# EAGLE board mirobot (EAGLE 6.5.0)
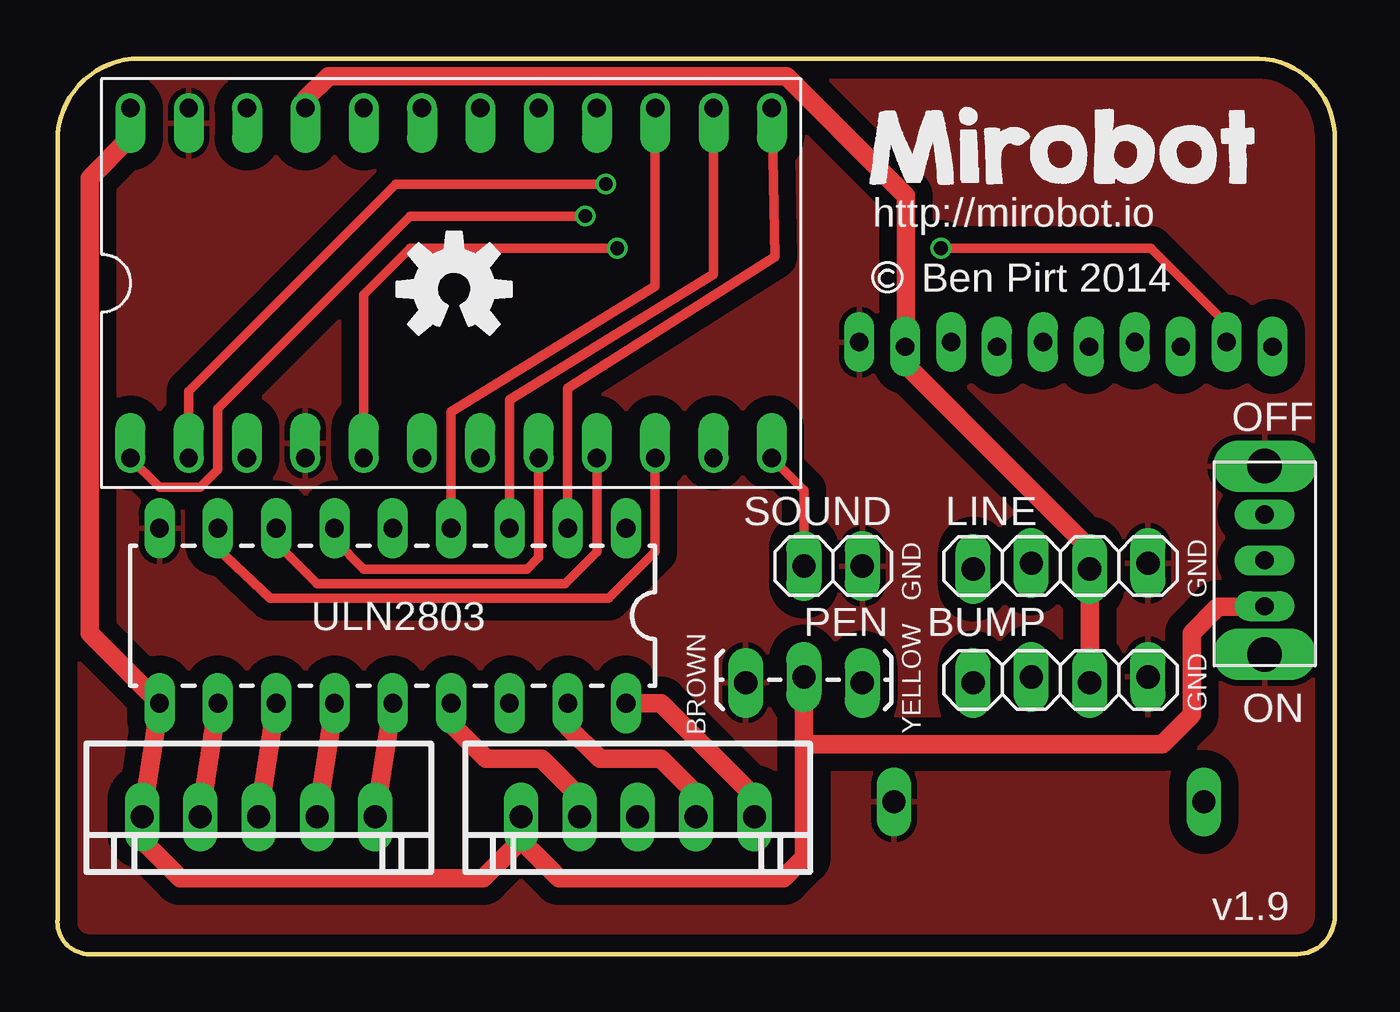
[diagram p0: board, top side]
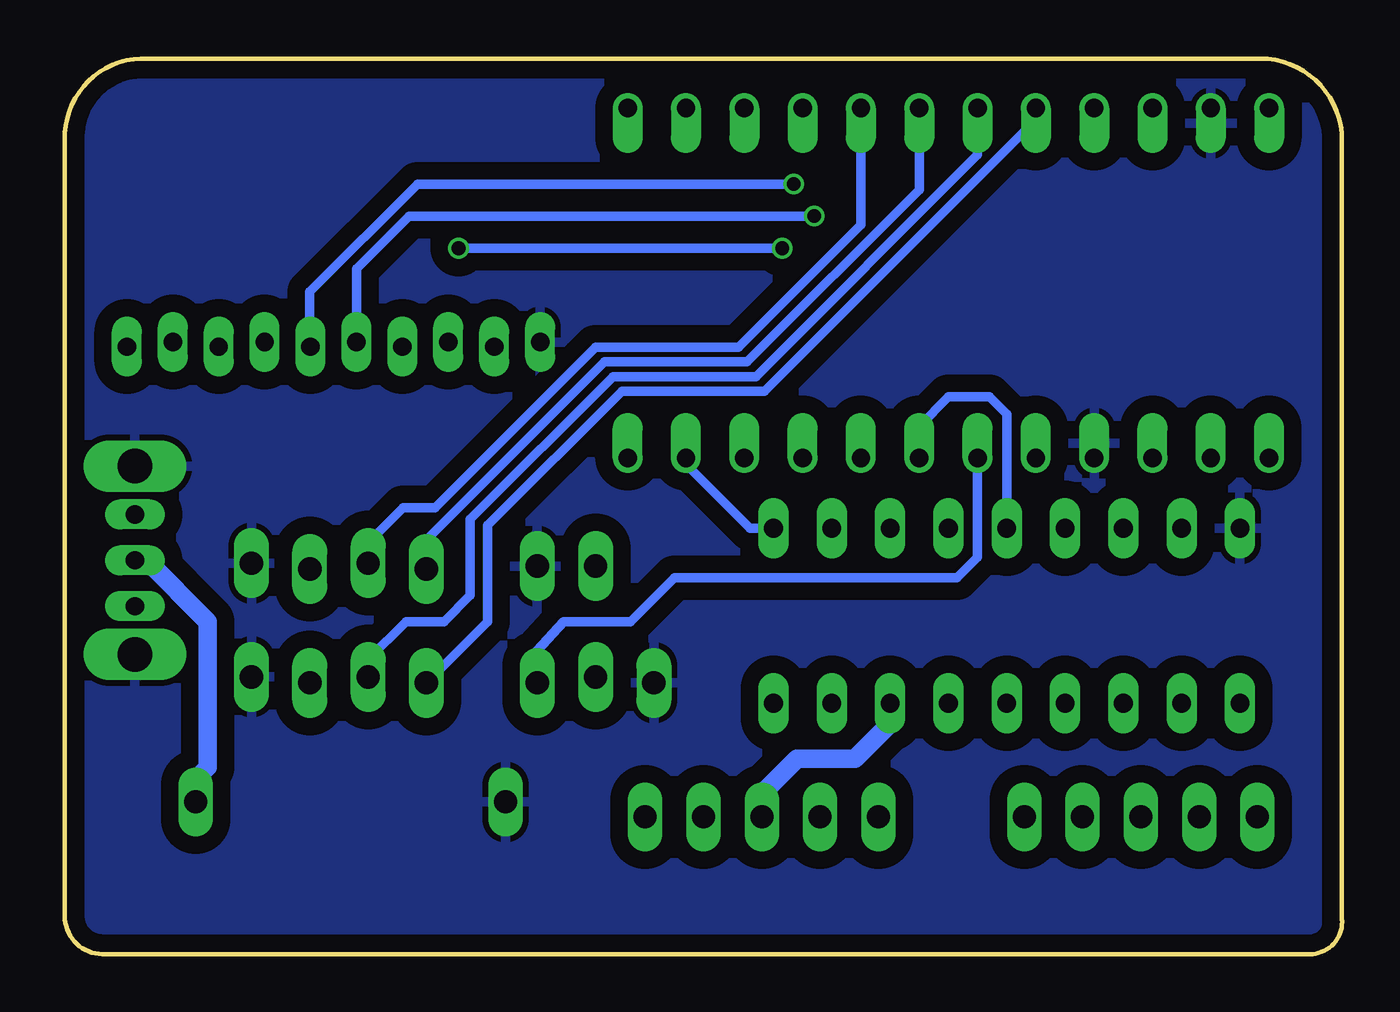
[diagram p1: board, bottom side, seen from below]

Size 55.63 x 38.99 mm. Coordinates in mm from the lower left corner, seen from the top.
Outline: 0.01,35.44 0.01,1.53 arc90 1.28,0 53.85,0 arc90 55.63,1.53 55.63,35.44 arc90 52.33,38.99 3.56,38.99 arc90 0.01,35.44
Copper layers (1*16): Top 0.035mm / dielectric 1.5mm / Bottom 0.035mm
Design rules "dirt_cheap_dirty_boards.v1": minimum track width 5mil, minimum drill 12mil, track to track 5mil, track to pad 5mil, pad to pad 5mil, via to via 5mil, smd to smd 0mil, copper to edge 10mil, drill to drill 10mil, minimum pad ring 10mil, minimum via ring 6mil, stop-mask expansion 2mil, vias tented up to drill 25mil, thermal gap 10mil
Net classes: 1 power: width 0.61 mm

## Footprints (pad centres in the part's own frame; a part is rotated, then mirrored left to right if it is on the bottom)
1X04 = drill 1.016 long: 1 -3.81,-0.127; 2 -1.27,0.127; 3 1.27,-0.127; 4 3.81,0.127
1X03_LOCK_LONGPADS = drill 1.016 long: 1 0,0; 2 2.54,-0.254; 3 5.08,0
1X02 = drill 1.016 long: 1 -1.27,0; 2 1.27,0
WIFI_MODULE-T = drill 0.8 long: +3V3 -6,-0.1; EXT_RESET -2,-0.1; GND -8,0.1; NRELOAD -4,0.1; PWM_1 10,-0.1; PWM_2 8,0.1; PWM_3 6,-0.1; PWR_SW 4,0.1; RX 0,0.1; TX 2,-0.1
ARDUINO_PRO_MINI = drill 0.8 offset: A0 7.62,-5.08; A1 7.62,-2.54; A2 7.62,0; A3 7.62,2.54; D2 -7.62,2.54; D3 -7.62,0; D4 -7.62,-2.54; D5 -7.62,-5.08; D6 -7.62,-7.62; D7 -7.62,-10.16; D8 -7.62,-12.7; D9 -7.62,-15.24; D10 7.62,-15.24; GND 7.62,10.16; GND2 -7.62,5.08; MISO 7.62,-10.16; MOSI 7.62,-12.7; RAW 7.62,12.7; RESET 7.62,7.62; RESET2 -7.62,7.62; RXI -7.62,10.16; SCK 7.62,-7.62; TXO -7.62,12.7; VCC 7.62,5.08
SPDT_SLIDE_SWITCH = drill 0.8 long: COMMON 0,0; SW1 -2,0; SW2 2,0 | drill 1.5 long: GND1 -4.1,0; GND2 4.1,0
BATTERY_PACK = drill 1 long: GND -14.5,1; VSS -1,1
DIL18 = drill 0.813 long: 1 -10.16,-3.81; 2 -7.62,-3.81; 3 -5.08,-3.81; 4 -2.54,-3.81; 5 0,-3.81; 6 2.54,-3.81; 7 5.08,-3.81; 8 7.62,-3.81; 9 10.16,-3.81; 10 10.16,3.81; 11 7.62,3.81; 12 5.08,3.81; 13 2.54,3.81; 14 0,3.81; 15 -2.54,3.81; 16 -5.08,3.81; 17 -7.62,3.81; 18 -10.16,3.81
5_PIN_STEPPER = drill 1 long: 1 -5.08,0; 2 -2.54,0; 3 0,0; 4 2.54,0; 5 5.08,0

## Placement (x,y rotation side)
BUMP  [1X04]  43.69,11.94 0 top
LINE  [1X04]  43.69,16.9 0 top
LOGO1  OSHW-LOGOM  [OSHW-LOGO-M]  17.28,28.96 0 top
PEN  [1X03_LOCK_LONGPADS]  35.06,11.82 180 top
SOUND  [1X02]  33.79,16.9 180 top
U$1  USR_WIFI-T  [WIFI_MODULE-T]  42.93,26.55 0 top
U$2  ARDUINO_PRO_MINI  [ARDUINO_PRO_MINI]  15.88,29.21 90 top
U$3  SPDT_SLIDE_SWITCH  [SPDT_SLIDE_SWITCH]  52.58,17.15 270 top
U$4  BATTERY_PACK  [BATTERY_PACK]  50.93,7.62 180 bottom
U$5  [LOGO]  43.65,34.99 0 top
ULN2803  [DIL18]  14.61,14.74 180 top
X1  5_PIN_STEPPER  [5_PIN_STEPPER]  25.28,5.97 180 top
X2  5_PIN_STEPPER  [5_PIN_STEPPER]  8.77,5.97 180 top

## Library data of the parts
BUMP LINE = Child-Friendly-Parts
LOGO1 = SparkFun-Aesthetics
PEN = SparkFun-Connectors
SOUND = pinhead
U$1 = usr_wifi
U$2-U$5 = custom
ULN2803 = SparkFun-PowerIC
X1 X2 = custom; MF: MOLEX; MPN: 22-23-2051; OC_FARNELL: 1462952; OC_NEWARK: 38C9178

## Nets
+3V3: BUMP.3 LINE.3 U$1.+3V3 U$2.VCC
GND: BUMP.4 LINE.4 PEN.3 SOUND.1 U$1.GND U$2.GND U$2.GND2 U$3.GND1 U$3.GND2 U$4.GND ULN2803.9
MOTOR1_1: U$2.D8 ULN2803.1
MOTOR1_2: U$2.D10 ULN2803.2
MOTOR1_3: U$2.MOSI ULN2803.3
MOTOR1_4: U$2.MISO ULN2803.4
MOTOR2_1: U$2.D4 ULN2803.5
MOTOR2_2: U$2.D5 ULN2803.6
MOTOR2_3: U$2.D6 ULN2803.7
MOTOR2_4: U$2.D7 ULN2803.8
N$1: ULN2803.18 X1.1
N$2: ULN2803.17 X1.2
N$3: ULN2803.16 X1.3
N$4: ULN2803.15 X1.4
N$5: ULN2803.14 X2.1
N$6: U$3.COMMON U$4.VSS
N$7: ULN2803.13 X2.2
N$8: ULN2803.12 X2.3
N$9: ULN2803.11 X2.4
NREADY: U$1.PWM_2 U$2.D2
PC0: LINE.2 U$2.A0
PC1: LINE.1 U$2.A1
PC2: BUMP.2 U$2.A2
PC3: BUMP.1 U$2.A3
RXD: U$1.TX U$2.RXI
SERVO: PEN.1 U$2.D3
SPEAKER: SOUND.2 U$2.D9
TXD: U$1.RX U$2.TXO
VSS: PEN.2 U$2.RAW U$3.SW2 ULN2803.10 X1.5 X2.5

## Tracks (layer width: path | path; a pad name or v marks a point on that pad's centre or on a via)
+3V3
  Top 0.813: U$2.VCC 10.8,37.22 11.82,38.23 31.76,38.23 36.96,33.02 36.96,26.48 U$1.+3V3 36.96,26.42 36.96,25.66 44.96,17.66 LINE.3 BUMP.3
GND
  pour Top (isolate 0.762): -1.88,40.61 26.12,40.61 48.27,40.39 56.52,40.39 56.95,-0.38 -1.48,-0.38 -1.88,26.26
  pour Bottom (isolate 0.762): -1.52,40.52 56.46,40.26 56.46,-0.5 -1.52,-0.25
MOTOR1_1
  Bottom 0.406: ULN2803.1 25.79,18.55 28.58,21.34 U$2.D8
MOTOR1_2
  Top 0.406: ULN2803.2 22.23,24.64 31.25,30.36 U$2.D10
MOTOR1_3
  Top 0.406: ULN2803.3 19.69,24.13 28.58,29.6 U$2.MOSI
MOTOR1_4
  Top 0.406: ULN2803.4 17.15,23.63 26.04,29.09 U$2.MISO
MOTOR2_1
  Bottom 0.406: U$2.D4 18.42,22.99 17.15,24.26 15.37,24.26 14.61,23.5 ULN2803.5
MOTOR2_2
  Top 0.406: U$2.D5 20.96,17.28 20.45,16.77 13.34,16.77 12.07,18.04 ULN2803.6
MOTOR2_3
  Top 0.406: U$2.D6 23.5,17.53 22.1,16.13 11.31,16.13 9.53,17.91 ULN2803.7
MOTOR2_4
  Top 0.406: U$2.D7 26.04,17.53 24.01,15.5 9.28,15.5 6.99,17.66 ULN2803.8
N$1
  Top 0.813: ULN2803.18 26.29,10.93 30.36,6.86 X1.1
N$2
  Top 0.813: ULN2803.17 22.23,9.91 23.63,8.51 26.29,8.51 27.82,6.99 X1.2
N$3
  Bottom 0.813: ULN2803.16 19.69,10.04 21.21,8.51 23.75,8.51 25.28,6.99 X1.3
N$4
  Top 0.813: ULN2803.15 17.15,10.04 18.67,8.51 21.09,8.51 22.74,6.86 X1.4
N$5
  Top 0.813: ULN2803.14 X2.1
N$6
  Bottom 0.813: U$3.COMMON 52.08,17.15 49.41,14.48 49.41,8.13 49.92,7.62 49.92,6.64 U$4.VSS
N$7
  Top 0.813: ULN2803.13 X2.2
N$8
  Top 0.813: ULN2803.12 X2.3
N$9
  Top 0.813: ULN2803.11 X2.4
NREADY  (via drill 0.6)
  Top 0.406: U$2.D2 13.34,28.71 15.37,30.74 v24.39,30.74 | v38.49,30.74 47.63,30.74 50.93,27.44 U$1.PWM_2
  Bottom 0.406: v24.39,30.74 v38.49,30.74
PC0
  Bottom 0.406: U$2.A0 20.96,31.75 26.29,26.42 32.52,26.42 39.5,19.44 40.9,19.44 42.42,17.91 LINE.2
PC1
  Bottom 0.406: U$2.A1 18.42,33.28 25.91,25.79 32.14,25.79 39.88,18.04 LINE.1
PC2
  Bottom 0.406: U$2.A2 15.88,34.8 25.53,25.15 31.76,25.15 37.98,18.93 37.98,15.63 39.12,14.48 40.77,14.48 42.42,12.83 BUMP.2
PC3
  Bottom 0.406: U$2.A3 13.34,36.33 25.15,24.52 31.37,24.52 37.22,18.67 37.22,14.48 BUMP.1
RXD  (via drill 0.6)
  Top 0.406: U$2.RXI 5.72,24.52 14.74,33.53 v23.88,33.53
  Bottom 0.406: v23.88,33.53 40.26,33.53 44.96,28.83 44.96,26.48 U$1.TX
SERVO
  Bottom 0.406: U$2.D3 15.88,17.28 16.77,16.39 29.09,16.39 30.99,14.48 33.91,14.48 35.06,13.21 PEN.1
SPEAKER
  Top 0.406: U$2.D9 32.52,20.2 SOUND.2
TXD  (via drill 0.6)
  Top 0.406: U$2.TXO 4.45,20.32 6.23,20.32 6.99,21.09 6.99,23.75 15.37,32.14 v22.99,32.14
  Bottom 0.406: v22.99,32.14 40.65,32.14 42.93,29.85 U$1.RX
VSS
  Top 0.813: U$2.RAW 3.18,35.56 1.4,33.79 1.4,13.97 ULN2803.10 X2.5 3.69,4.96 5.34,3.31 18.55,3.31 20.2,4.96 | 32.52,9.15 32.52,4.2 31.63,3.31 21.85,3.31 20.2,4.96 | 20.2,4.96 X1.5 | PEN.2 32.52,9.15 | 32.52,9.15 48.14,9.15 49.41,10.42 49.41,13.97 50.55,15.12 52.81,15.12 U$3.SW2

## Text on the board
tPlace: http://mirobot.io | OFF | ON
tNames: Ben Pirt 2014 | GND | GND | BROWN | YELLOW | GND | v1.9